# Altium PCB InputCard.PcbDoc
Units mm, origin at the board's own origin, x right, y up, seen from the top; angles counter-clockwise.
Board outline 160 x 100 mm, 2 copper layers (Top Layer, Bottom Layer); 103 components, 109 nets, 551 pads, 68 vias.
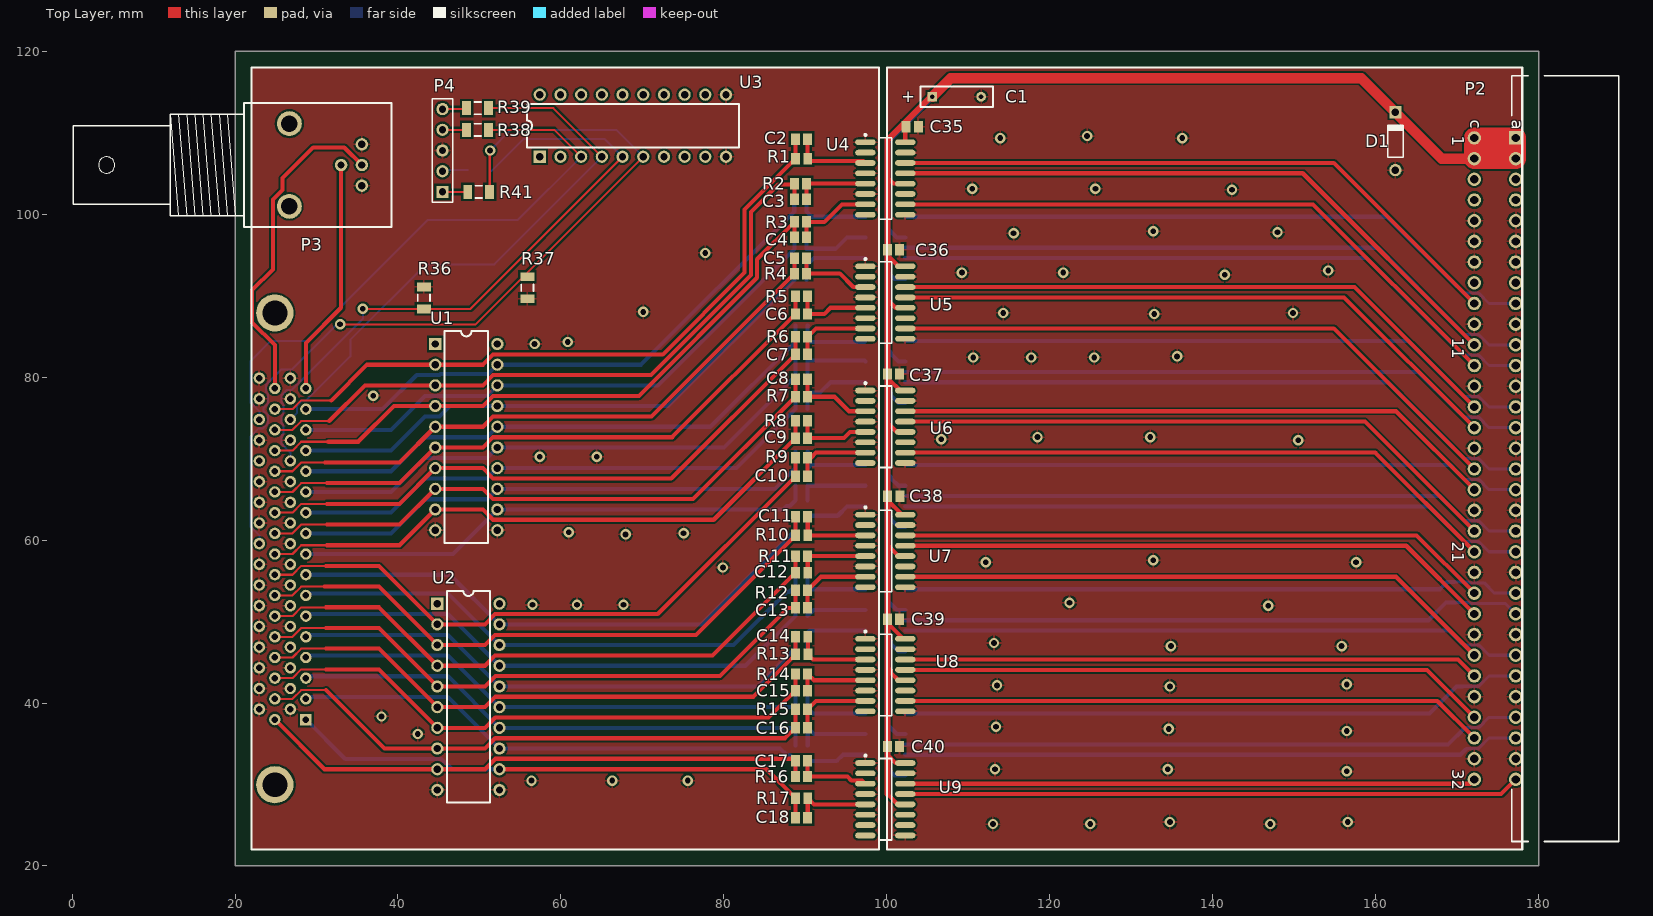
[diagram p0: Top Layer view]
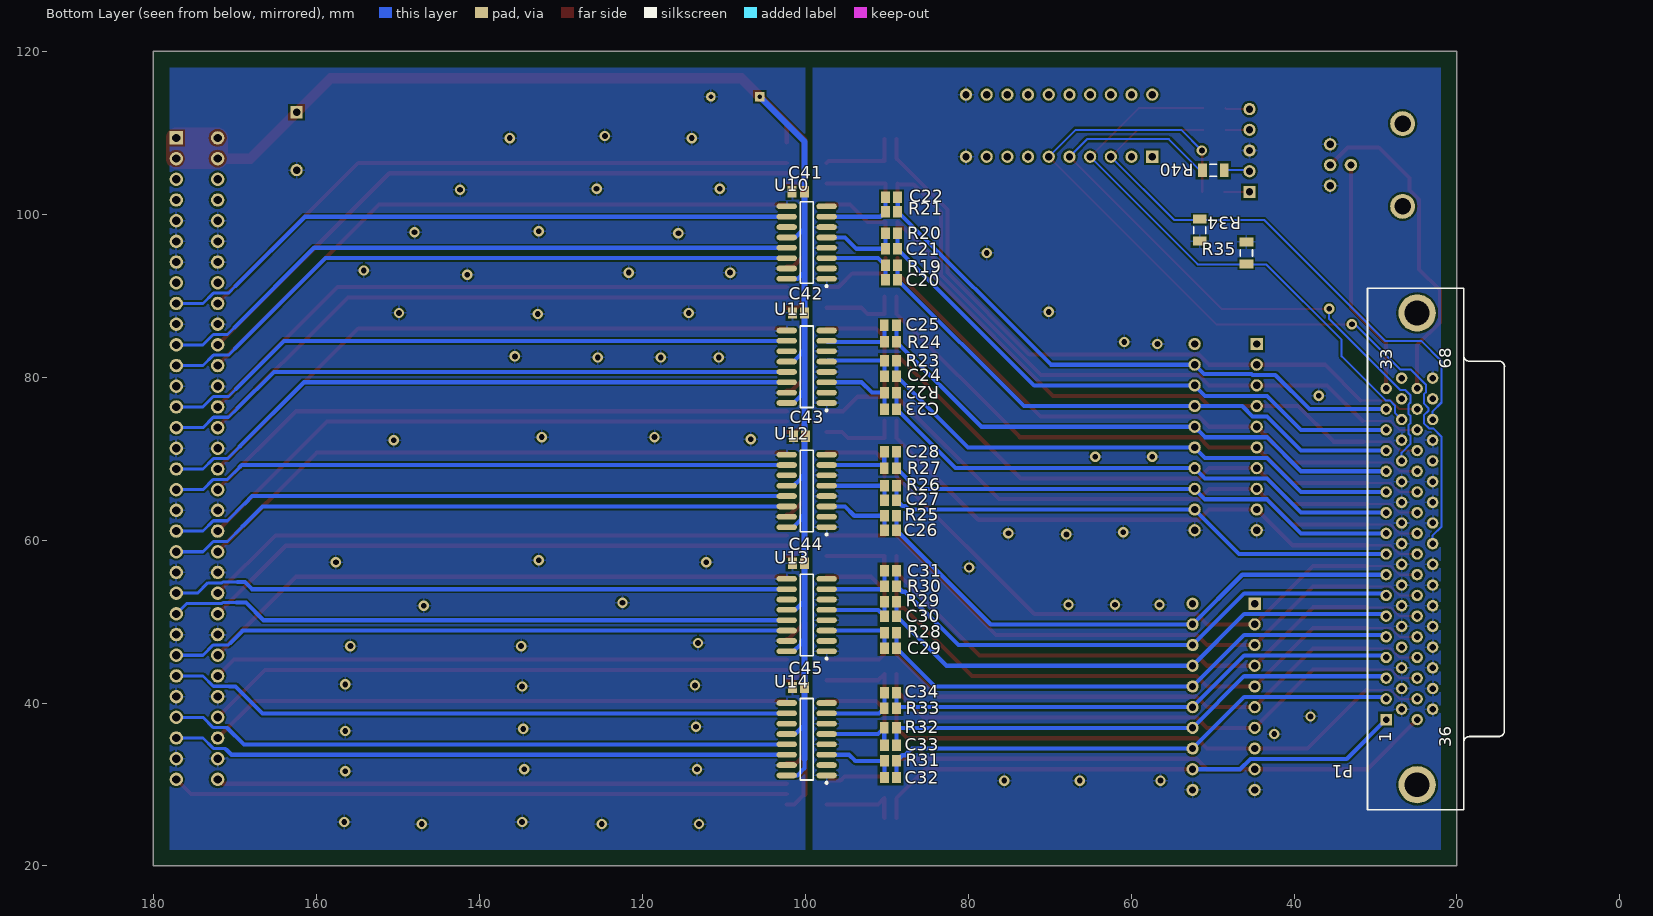
[diagram p1: Bottom Layer view, seen from below]

## Layer stack, top to bottom
Top Solder: solder mask 0.0102, Solder Resist, Dk 3.5
Top Layer: signal copper 0.0356
Dielectric 1: dielectric 0.32, FR-4, Dk 4.8
Bottom Layer: signal copper 0.0356
Bottom Solder: solder mask 0.0102, Solder Resist, Dk 3.5

## Board outline
20,20 180,20 180,120 20,120

## Design rules (kind name [scope] priority, off if disabled: settings)
Clearance [All] p1: gap=0.254 ignorepadtopadclearanceinfootprint=FALSE except(0: Arc-Hole Track-Hole SMDPad-Hole THPad-Hole Via-Hole Fill-Hole Poly-Hole Region-Hole Text-Hole)
PolygonConnect [All] p1: connectstyle=Relief reliefconductorwidth=0.254 reliefentries=4 polygonreliefangle="90 Angle" airgapwidth=0.254
RoutingVias [All] p1: holewidth=0.711 width=1.27 viastyle="Through Hole" minholewidth=0.711 minwidth=1.27 maxholewidth=0.711 maxwidth=1.27
SolderMaskExpansion [All] p1: expansion=0.102
Width [All] p1: maxlimit=2.54 minlimit=0.254 preferedwidth=0.508
30 further rules are at their usual default settings.

## Components (designator, comment, footprint, x,y, rotation, side; value= is the part's Value field where it differs from the comment)
C1 "Cap Pol1" Captantalum 108.585,114.427 r180 top value=10uF
C2 "Cap Semi" 0805 89.535,109.22 r0 top value=100pF
C3 "Cap Semi" 0805 89.408,101.854 r0 top value=100pF
C4 "Cap Semi" 0805 89.408,97.155 r0 top value=100pF
C5 "Cap Semi" 0805 89.408,94.615 r0 top value=100pF
C6 "Cap Semi" 0805 89.535,87.757 r0 top value=100pF
C7 "Cap Semi" 0805 89.523,82.804 r0 top value=100pF
C8 "Cap Semi" 0805 89.523,79.756 r0 top value=100pF
C9 "Cap Semi" 0805 89.535,72.517 r0 top value=100pF
C10 "Cap Semi" 0805 89.535,67.818 r0 top value=100pF
C11 "Cap Semi" 0805 89.535,62.865 r0 top value=100pF
C12 "Cap Semi" 0805 89.547,56.007 r0 top value=100pF
C13 "Cap Semi" 0805 89.523,51.689 r0 top value=100pF
C14 "Cap Semi" 0805 89.547,48.133 r0 top value=100pF
C15 "Cap Semi" 0805 89.535,41.529 r0 top value=100pF
C16 "Cap Semi" 0805 89.523,36.957 r0 top value=100pF
C17 "Cap Semi" 0805 89.523,32.893 r0 top value=100pF
C18 "Cap Semi" 0805 89.535,25.908 r0 top value=100pF
C20 "Cap Semi" 0805 89.408,91.948 r0 bottom value=100pF
C21 "Cap Semi" 0805 89.408,95.758 r0 bottom value=100pF
C22 "Cap Semi" 0805 89.396,102.108 r0 bottom value=100pF
C23 "Cap Semi" 0805 89.535,76.073 r0 bottom value=100pF
C24 "Cap Semi" 0805 89.535,80.137 r0 bottom value=100pF
C25 "Cap Semi" 0805 89.547,86.36 r0 bottom value=100pF
C26 "Cap Semi" 0805 89.535,61.214 r0 bottom value=100pF
C27 "Cap Semi" 0805 89.535,64.897 r0 bottom value=100pF
C28 "Cap Semi" 0805 89.535,70.866 r0 bottom value=100pF
C29 "Cap Semi" 0805 89.535,46.736 r0 bottom value=100pF
C30 "Cap Semi" 0805 89.523,50.673 r0 bottom value=100pF
C31 "Cap Semi" 0805 89.535,56.261 r0 bottom value=100pF
C32 "Cap Semi" 0805 89.535,30.861 r0 bottom value=100pF
C33 "Cap Semi" 0805 89.535,34.798 r0 bottom value=100pF
C34 "Cap Semi" 0805 89.535,41.275 r0 bottom value=100pF
C35 "Cap Semi" 0805 103.124,110.744 r0 top value=47nF
C36 "Cap Semi" 0805 100.838,95.631 r0 top value=47nF
C37 "Cap Semi" 0805 100.838,80.391 r0 top value=47nF
C38 "Cap Semi" 0805 100.85,65.405 r0 top value=47nF
C39 "Cap Semi" 0805 100.838,50.292 r0 top value=47nF
C40 "Cap Semi" 0805 100.838,34.671 r0 top value=47nF
C41 "Cap Semi" 0805 100.85,102.743 r0 bottom value=47nF
C42 "Cap Semi" 0805 100.838,87.884 r0 bottom value=47nF
C43 "Cap Semi" 0805 100.711,72.771 r0 bottom value=47nF
C44 "Cap Semi" 0805 100.838,57.15 r0 bottom value=47nF
C45 "Cap Semi" 0805 100.838,41.91 r0 bottom value=47nF
D1 "Zener Diode BZX79C5V6" DO-35 162.433,108.966 r90 top
P1 "TE 2-5174225-5" "Connector 68 plug" 19.177,58.928 r90 bottom
P2 "HARTING 09032646824" EURO2.54-2H64-NH 182.5,70 r270 top
P3 "Winchester Interconnect 364A2595" "Double BNC 2" 33.02,106.045 r180 top
P4 "Header 5" HDR1X5 45.466,102.743 r90 top
R1 "Res" 0805 89.547,106.807 r0 top value=510R
R2 "Res" 0805 89.408,103.759 r0 top value=510R
R3 "Res" 0805 89.408,99.06 r0 top value=510R
R4 "Res" 0805 89.396,92.71 r0 top value=510R
R5 "Res" 0805 89.535,89.916 r0 top value=510R
R6 "Res" 0805 89.535,84.963 r0 top value=510R
R7 "Res" 0805 89.523,77.597 r0 top value=510R
R8 "Res" 0805 89.535,74.676 r0 top value=510R
R9 "Res" 0805 89.535,70.104 r0 top value=510R
R10 "Res" 0805 89.547,60.579 r0 top value=510R
R11 "" 0805 89.535,58.039 r0 top value=510R
R12 "Res" 0805 89.535,53.848 r0 top value=510R
R13 "Res" 0805 89.559,45.974 r0 top value=510R
R14 "Res" 0805 89.535,43.561 r0 top value=510R
R15 "Res" 0805 89.535,39.243 r0 top value=510R
R16 "Res" 0805 89.535,30.988 r0 top value=510R
R17 "Res" 0805 89.547,28.321 r0 top value=510R
R19 "Res" 0805 89.408,93.726 r0 bottom value=510R
R20 "Res" 0805 89.408,97.663 r0 bottom value=510R
R21 "Res" 0805 89.396,100.33 r0 bottom value=510R
R22 "Res" 0805 89.523,78.105 r0 bottom value=510R
R23 "Res" 0805 89.535,82.042 r0 bottom value=510R
R24 "Res" 0805 89.535,84.328 r0 bottom value=510R
R25 "Res" 0805 89.535,62.992 r0 bottom value=510R
R26 "Res" 0805 89.535,66.675 r0 bottom value=510R
R27 "Res" 0805 89.547,68.834 r0 bottom value=510R
R28 "Res" 0805 89.535,48.641 r0 bottom value=510R
R29 "Res" 0805 89.535,52.451 r0 bottom value=510R
R30 "Res" 0805 89.535,54.356 r0 bottom value=510R
R31 "Res" 0805 89.535,32.893 r0 bottom value=510R
R32 "Res" 0805 89.547,36.957 r0 bottom value=510R
R33 "Res" 0805 89.547,39.37 r0 bottom value=510R
R34 "" 1206 51.562,98.044 r270 bottom value=1k
R35 "" 1206 45.847,95.25 r90 bottom value=1k
R36 "" 1206 43.18,89.742 r90 top value=1k
R37 "" 1206 55.88,90.979 r270 top value=1k
R38 "" 1206 49.784,110.363 r180 top value=0R
R39 "" 1206 49.784,113.03 r180 top value=0R
R40 "" 1206 49.911,105.41 r180 bottom value=0R
R41 "" 1206 49.911,102.743 r180 top value=0R
U1 "SN74S1053" DIP-20 48.387,72.644 r0 top
U2 "SN74S1053" DIP-20 48.641,40.767 r0 top
U3 "SN74S1053" DIP-20 68.834,110.871 r90 top
U4 "IL613-3E" R-16_M 99.822,104.394 r0 top
U5 "IL613-3E" R-16_M 99.822,89.154 r0 top
U6 "IL613-3E" R-16_M 99.822,73.914 r0 top
U7 "IL613-3E" R-16_M 99.822,58.674 r0 top
U8 "IL613-3E" R-16_M 99.822,43.434 r0 top
U9 "IL613-3E" R-16_M 99.822,28.194 r0 top
U10 "IL613-3E" R-16_M 99.822,96.52 r0 bottom
U11 "IL613-3E" R-16_M 99.822,81.28 r0 bottom
U12 "IL613-3E" R-16_M 99.822,66.04 r0 bottom
U13 "IL613-3E" R-16_M 99.822,50.8 r0 bottom
U14 "IL613-3E" R-16_M 99.822,35.56 r0 bottom

## Footprints (in the part's own frame and the unit in brackets; to place one, negate y for a bottom-side part, rotate by r counter-clockwise, add the part's x,y. Pads: shape width x height; smd on the part's side, far side on the other; paste and mask are expansions set on the pad)
0805 [mm] "Chip Capacitor, Body 2.0x1.3mm, IPC High Density"
  rect 1.1x1.4 smd: 1(-0.75,0) 2(0.75,0)
  body extent -1.1,-0.72 1.1,0.72, height 1.4
1206 [mm] "Chip Capacitor, Body 3.2x1.6mm, IPC High Density"
  rect 1.1x1.7 smd: 1(-1.35,0) 2(1.35,0)
  silkscreen extent -0.4,-0.75 0.4,0.75, body extent -1.7,-0.9 1.7,0.9, height 1.3
Captantalum [mm] "Polarized Capacitor (Radial); 2 Leads"
  rect 1.2x1.2 hole 0.6: 1(3,0)
  round 1.2 hole 0.6: 2(-3,0)
  silkscreen extent -4.44,-1.27 4.44,1.27
"Connector 68 plug" [mm] "Connector; D Subminiature 050 Series; 68 Position; Right Angle"
  rect 1.4x1.4 hole 0.8: 1(-20.955,9.515)
  round 1.4 hole 0.8: 2(-19.685,7.61) 3(-18.415,9.515) 4(-17.145,7.61) 5(-15.875,9.515) 6(-14.605,7.61) 7(-13.335,9.515) 8(-12.065,7.61) 9(-10.795,9.515) 10(-9.525,7.61) 11(-8.255,9.515) 12(-6.985,7.61) 13(-5.715,9.515) 14(-4.445,7.61) 15(-3.175,9.515) 16(-1.905,7.61) 17(-0.635,9.515) 18(0.635,7.61) 19(1.905,9.515) 20(3.175,7.61) 21(4.445,9.515) 22(5.715,7.61) 23(6.985,9.515) 24(8.255,7.61) 25(9.525,9.515) 26(10.795,7.61) 27(12.065,9.515) 28(13.335,7.61) 29(14.605,9.515) 30(15.875,7.61) 31(17.145,9.515) 32(18.415,7.61) 33(19.685,9.515) 34(20.955,7.61) 35(-20.955,5.705) 36(-19.685,3.8) 37(-18.415,5.705) 38(-17.145,3.8) 39(-15.875,5.705) 40(-14.605,3.8) 41(-13.335,5.705) 42(-12.065,3.8) 43(-10.795,5.705) 44(-9.525,3.8) 45(-8.255,5.705) 46(-6.985,3.8) 47(-5.715,5.705) 48(-4.445,3.8) 49(-3.175,5.705) 50(-1.905,3.8) 51(-0.635,5.705) 52(0.635,3.8) 53(1.905,5.705) 54(3.175,3.8) 55(4.445,5.705) 56(5.715,3.8) 57(6.985,5.705) 58(8.255,3.8) 59(9.525,5.705) 60(10.795,3.8) 61(12.065,5.705) 62(13.335,3.8) 63(14.605,5.705) 64(15.875,3.8) 65(17.145,5.705) 66(18.415,3.8) 67(19.685,5.705) 68(20.955,3.8)
  round 4.572 hole 3.048: M(-28.955,5.71) M(28.955,5.71)
  silkscreen extent -32,-5.03 32,11.81
DIP-20 [mm]
  rect 1.5x1.5 hole 0.9: 1(-3.81,11.43)
  round 1.5 hole 0.9: 2(-3.81,8.89) 3(-3.81,6.35) 4(-3.81,3.81) 5(-3.81,1.27) 6(-3.81,-1.27) 7(-3.81,-3.81) 8(-3.81,-6.35) 9(-3.81,-8.89) 10(-3.81,-11.43) 11(3.81,-11.43) 12(3.81,-8.89) 13(3.81,-6.35) 14(3.81,-3.81) 15(3.81,-1.27) 16(3.81,1.27) 17(3.81,3.81) 18(3.81,6.35) 19(3.81,8.89) 20(3.81,11.43)
  silkscreen extent -2.65,-13 2.65,13
DO-35 [mm] "Diode, Axial; Body 3.8 x 1.9 mm (LxDia. max), Lead Dia. 0.53 mm (max)"
  round 1.5 hole 0.9: 1(-3.55,0)
  rect 1.5x1.5 hole 0.9: 2(3.55,0)
  silkscreen extent -1.95,-0.95 2.05,0.95
"Double BNC 2" [mil]
  round 60 hole 35: 1(-100,100) 2(-100,0) 3(-100,-100) 4(0,0)
  round 120 hole 79: ""(250,200) ""(250,-200)
  silkscreen extent -244,-300 1294,300
EURO2.54-2H64-NH [mm] "Connector; DIN 41612, Type C, Thru-Hole; Rows a+c, 64 Position; Right Angle"
  rect 1.65x1.65 hole 1: A1(-39.37,-5.3)
  round 1.65 hole 1: A2(-36.83,-5.3) A3(-34.29,-5.3) A4(-31.75,-5.3) A5(-29.21,-5.3) A6(-26.67,-5.3) A7(-24.13,-5.3) A8(-21.59,-5.3) A9(-19.05,-5.3) A10(-16.51,-5.3) A11(-13.97,-5.3) A12(-11.43,-5.3) A13(-8.89,-5.3) A14(-6.35,-5.3) A15(-3.81,-5.3) A16(-1.27,-5.3) A17(1.27,-5.3) A18(3.81,-5.3) A19(6.35,-5.3) A20(8.89,-5.3) A21(11.43,-5.3) A22(13.97,-5.3) A23(16.51,-5.3) A24(19.05,-5.3) A25(21.59,-5.3) A26(24.13,-5.3) A27(26.67,-5.3) A28(29.21,-5.3) A29(31.75,-5.3) A30(34.29,-5.3) A31(36.83,-5.3) A32(39.37,-5.3) C1(-39.37,-10.38) C2(-36.83,-10.38) C3(-34.29,-10.38) C4(-31.75,-10.38) C5(-29.21,-10.38) C6(-26.67,-10.38) C7(-24.13,-10.38) C8(-21.59,-10.38) C9(-19.05,-10.38) C10(-16.51,-10.38) C11(-13.97,-10.38) C12(-11.43,-10.38) C13(-8.89,-10.38) C14(-6.35,-10.38) C15(-3.81,-10.38) C16(-1.27,-10.38) C17(1.27,-10.38) C18(3.81,-10.38) C19(6.35,-10.38) C20(8.89,-10.38) C21(11.43,-10.38) C22(13.97,-10.38) C23(16.51,-10.38) C24(19.05,-10.38) C25(21.59,-10.38) C26(24.13,-10.38) C27(26.67,-10.38) C28(29.21,-10.38) C29(31.75,-10.38) C30(34.29,-10.38) C31(36.83,-10.38) C32(39.37,-10.38)
  silkscreen extent -47,-5.8 47,7.34, body extent -47,-5.8 47,7.34, height 11.1
HDR1X5 [mm] "Connector; Header; 5 Position"
  rect 1.5x1.5 hole 0.9: 1(0,0)
  round 1.5 hole 0.9: 2(2.54,0) 3(5.08,0) 4(7.62,0) 5(10.16,0)
  silkscreen extent -1.27,-1.27 11.43,1.27
R-16_M [mm] "SOIC, 16-Leads, Body 9.9x3.9mm, Pitch 1.27mm, IPC Low Density"
  oval 2.5x0.7 smd: 1(-2.45,4.445) 2(-2.45,3.175) 3(-2.45,1.905) 4(-2.45,0.635) 5(-2.45,-0.635) 6(-2.45,-1.905) 7(-2.45,-3.175) 8(-2.45,-4.445) 9(2.45,-4.445) 10(2.45,-3.175) 11(2.45,-1.905) 12(2.45,-0.635) 13(2.45,0.635) 14(2.45,1.905) 15(2.45,3.175) 16(2.45,4.445)
  silkscreen extent -2.57,-5 0.8,5.47, body extent -2,-5 2,5, height 1.75

## Part data
C1: "Polarized Capacitor (Radial)", LatestRevisionDate=17-Jul-2002, LatestRevisionNote="Re-released for DXP Platform.", PackageDescription="Polarized Capacitor (Radial); 2 Leads", PackageReference=RB7.6-15, Published=8-Jun-2000, Publisher="Altium Limited"
C2 C3 C4 C5 C6 C7 C8 C9 C10 C11 C12 C13 C14 C15 C16 C17 C18 C20 C21 C22 C23 C24 C25 C26 C27 C28 C29 C30 C31 C32 C33 C34 C35 C36 C37 C38 C39 C40 C41 C42 C43 C44 C45: "Capacitor (Semiconductor SIM Model)", LatestRevisionDate=29-May-2009, LatestRevisionNote="IPC-7351 Footprint Added.", PackageDescription="Chip Capacitor", PackageReference=C1206, Published=8-Jun-2000, Publisher="Altium Limited"
D1: library part "Diode 1N914", "High Conductance Fast Diode", Code_JEDEC=DO-204-AH, ComponentLink1Description="Manufacturer Link", ComponentLink1URL=http://www.fairchildsemi.com/, ComponentLink2Description=Datasheet, ComponentLink2URL=http://www.fairchildsemi.com/ds/1N%2F1N4448.pdf, DatasheetVersion=1997, LatestRevisionDate=17-Jul-2002, LatestRevisionNote="Re-released for DXP Platform.", PackageDescription="Diode, Axial; Body 3.8 x 1.9 mm (LxDia. max), Lead Dia. 0.53 mm (max)", PackageReference=DO-35, Published=8-Jun-2000, Publisher="Altium Limited"
P1: library part "Connector 68", "Receptacle Header Assemby", PackageDocument=B, DatasheetDocument=1-Oct-1983, LatestRevisionDate=17-Jul-2002, LatestRevisionNote="Re-released for DXP Platform.", Orientation="Right Angle", PackageReference=178240-8, Positions=68, Published=15-Jun-2001, Publisher="Altium Limited"
P2: library part "Din 41612 64NH", "Din 41612"
P3: library part "Double BNC New", "Double BNC Elbow Connector", LatestRevisionDate=17-Jul-2002, LatestRevisionNote="Re-released for DXP Platform.", Publisher="Altium Limited"
P4: "Header, 5-Pin", LatestRevisionDate=17-Jul-2002, LatestRevisionNote="Re-released for DXP Platform.", Publisher="Altium Limited"
R1 R2 R3 R4 R5 R6 R7 R8 R9 R10 R12 R13 R14 R15 R16 R17 R19 R20 R21 R22 R23 R24 R25 R26 R27 R28 R29 R30 R31 R32 R33: library part Res_SM, "Resistor", LatestRevisionDate=29-May-2009, LatestRevisionNote="IPC-7351 Footprint Added.", PackageDescription="Chip Resistor", PackageReference=J1-0603, Published=8-Jun-2000, Publisher="Altium Limited"
R11 R34 R35 R36 R37 R38 R39 R40 R41: library part Res3, "Resistor", LatestRevisionDate=29-May-2009, LatestRevisionNote="IPC-7351 Footprint Added.", PackageDescription="Chip Resistor", PackageReference=J1-0603, Published=8-Jun-2000, Publisher="Altium Limited"

## Via types
v1: diameter 1.27, hole 0.711, Top Layer to Bottom Layer, 68 vias

## Nets (pads, with @x,y where several pads share a name; then routed paths per layer and width w, separated by ;. In a path a pad name is that pad's centre, name@x,y a point inside that pad or via, vN(x,y) a via of type N, cw(c..) or ccw(c..) an arc to the next point about the centre after c; other vN are vias at no path point)
+5V: C1.1 C35.1 C36.1 C37.1 C38.1 C39.1 C40.1 C41.1 C42.1 C43.1 C44.1 C45.1 D1.2 P2.A1 P2.A2 P2.C1 P2.C2 U4.12 U4.16 U5.12 U5.16 U6.12 U6.16 U7.12 U7.16 U8.12 U8.16 U9.12 U9.16 U10.12 U10.16 U11.12 U11.16 U12.12 U12.16 U13.12 U13.16 U14.12 U14.16 | length 319.9
  Top Layer w0.508: 100.076,28.829 101.346,27.559 U9.12 ; 100.076,33.655 101.092,32.639 U9.16 ; 100.076,44.45 100.514,44.012 100.514,43.714 101.429,42.799 U8.12 ; C39.1@100.076,50.292 100.076,49.836 102.033,47.879 U8.16 ; 100.076,59.436 100.514,58.998 100.514,58.954 101.429,58.039 U7.12 ; C38.1@100.076,64.897 101.854,63.119 U7.16 ; 100.076,74.422 101.219,73.279 U6.12 ; 100.076,89.535 101.092,88.519 U5.12 ; C36.1@100.076,94.996 101.473,93.599 U5.16 ; 100.076,104.521 100.838,103.759 U4.12 ; C37.1@100.292,79.718 101.652,78.359 U6.16 ; U4.16 102.272,110.642 C35.1
  Top Layer w0.762: 100.076,28.829 100.076,33.655 100.076,44.45 C39.1@100.076,49.836 ; C39.1@100.076,50.292 100.076,59.436 100.076,64.897 100.076,74.422 100.076,89.535 100.076,94.996 100.076,104.521 100.076,109.106 105.397,114.427 C1.1
  Top Layer w1.27: C1.1 107.871,116.713 158.236,116.713 D1.2 168.119,106.83 P2.C2
  Top Layer w2.54: P2.C2 P2.A2 P2.A1 P2.C1 P2.C2
  Bottom Layer w0.508: 100.076,33.147 100.076,32.004 100.965,31.115 U14.16 ; 100.076,37.338 101.219,36.195 U14.12 ; 100.076,48.006 100.514,47.568 100.514,47.27 101.429,46.355 U13.16 ; 100.076,52.578 101.219,51.435 U13.12 ; 100.076,63.246 100.514,62.808 100.514,62.51 101.429,61.595 U12.16 ; 100.076,68.199 100.514,67.761 100.514,67.59 101.429,66.675 U12.12 ; 100.076,78.486 100.514,78.048 100.514,77.75 101.429,76.835 U11.16 ; 100.076,83.439 100.514,83.001 100.514,82.83 101.429,81.915 U11.12 ; 100.076,92.964 100.965,92.075 U10.16 ; 100.076,98.298 101.219,97.155 U10.12
  Bottom Layer w0.762: 100.076,33.147 100.076,37.338 100.076,48.006 100.076,52.578 100.076,63.246 100.076,68.199 100.076,78.486 100.076,83.439 100.076,92.964 100.076,98.298 100.076,108.918 C1.1
A0: P2.C9 U4.14 | length 77
  Top Layer w0.508: U4.14 154.871,106.299 P2.C9
A1: P2.A9 U10.10 | length 79.3
  Bottom Layer w0.381: 169.926,91.186 170.793,90.319 172.646,90.319 173.915,89.05 P2.A9
  Bottom Layer w0.508: U10.10 161.417,99.695 169.926,91.186
A2: P2.C11 U4.13 | length 78.6
  Top Layer w0.508: U4.13 151.061,105.029 P2.C11
A3: P2.A11 U10.13 | length 79.9
  Bottom Layer w0.381: 170.053,86.106 170.92,85.239 172.646,85.239 173.915,83.97 P2.A11
  Bottom Layer w0.508: U10.13 160.274,95.885 170.053,86.106
A4: P2.C12 U4.10 | length 78
  Top Layer w0.508: U4.10 152.331,101.219 P2.C12
A5: P2.A12 U10.14 | length 80.4
  Bottom Layer w0.381: 169.99,83.502 170.793,82.699 172.646,82.699 173.915,81.43 P2.A12
  Bottom Layer w0.508: U10.14 158.877,94.615 169.99,83.502
A6: P2.C14 U5.14 | length 75.9
  Top Layer w0.508: U5.14 157.411,91.059 P2.C14
A7: P2.A14 U11.10 | length 78.3
  Bottom Layer w0.381: 169.862,78.55 170.793,77.619 172.646,77.619 173.915,76.35 P2.A14
  Bottom Layer w0.508: U11.10 163.957,84.455 169.862,78.55
B0: P2.C15 U5.13 | length 76.5
  Top Layer w0.508: U5.13 156.141,89.789 P2.C15
B1: P2.A15 U11.13 | length 77.8
  Bottom Layer w0.381: 169.672,76.2 170.793,75.079 172.646,75.079 173.915,73.81 P2.A15
  Bottom Layer w0.508: U11.13 165.227,80.645 169.672,76.2
B2: P2.C17 U5.10 | length 77
  Top Layer w0.508: U5.10 154.871,85.979 P2.C17
B3: P2.A17 U11.14 | length 79.3
  Bottom Layer w0.381: 169.418,71.501 170.92,69.999 172.646,69.999 173.915,68.73 P2.A17
  Bottom Layer w0.508: U11.14 161.544,79.375 169.418,71.501
B4: P2.C18 U6.14 | length 73.8
  Top Layer w0.508: U6.14 162.491,75.819 P2.C18
B5: P2.A18 U12.10 | length 76.2
  Bottom Layer w0.381: 169.418,68.961 170.92,67.459 172.646,67.459 173.915,66.19 P2.A18
  Bottom Layer w0.508: U12.10 169.164,69.215 169.418,68.961
B6: P2.C20 U6.13 | length 75.4
  Top Layer w0.508: U6.13 158.681,74.549 P2.C20
B7: P2.A20 U12.13 | length 76.7
  Bottom Layer w0.381: 168.783,64.516 170.92,62.379 172.646,62.379 173.915,61.11 P2.A20
  Bottom Layer w0.508: U12.13 167.894,65.405 168.783,64.516
C0: P2.C21 U6.10 | length 74.9
  Top Layer w0.508: U6.10 159.951,70.739 P2.C21
C1: P2.A21 U12.14 | length 77.2
  Bottom Layer w0.381: 169.037,61.722 170.92,59.839 172.646,59.839 173.915,58.57 P2.A21
  Bottom Layer w0.508: U12.14 166.624,64.135 169.037,61.722
C2: P2.C23 U7.14 | length 72.8
  Top Layer w0.508: U7.14 165.031,60.579 P2.C23
C3: P2.A23 U13.10 | length 75.9
  Bottom Layer w0.381: 169.672,54.864 171.491,54.864 171.594,54.761 173.331,54.761 174.602,53.49 P2.A23
  Bottom Layer w0.508: U13.10 167.894,53.975 168.783,54.864 169.672,54.864
C4: P2.C24 U7.13 | length 73.3
  Top Layer w0.508: U7.13 163.761,59.309 P2.C24
C5: P2.A24 U13.13 | length 76.4
  Bottom Layer w0.381: 169.799,52.324 171.491,52.324 171.594,52.221 175.93,52.221 P2.A24
  Bottom Layer w0.508: U13.13 166.497,50.165 168.656,52.324 169.799,52.324
C6: P2.C26 U7.10 | length 73.8
  Top Layer w0.508: U7.10 162.491,55.499 P2.C26
C7: P2.A26 U13.14 | length 76.2
  Bottom Layer w0.381: 170.561,47.371 170.793,47.139 172.646,47.139 173.915,45.87 P2.A26
  Bottom Layer w0.508: U13.14 169.037,48.895 170.561,47.371
D0: P2.C27 U8.14 | length 70.7
  Top Layer w0.508: U8.14 170.111,45.339 P2.C27
D1: P2.A27 U14.10 | length 76.8
  Bottom Layer w0.381: 170.688,42.037 170.712,42.061 172.646,42.061 173.915,43.33 P2.A27
  Bottom Layer w0.508: U14.10 166.624,38.735 169.926,42.037 170.688,42.037
D2: P2.C29 U8.13 | length 72.3
  Top Layer w0.508: U8.13 166.301,44.069 P2.C29
D3: P2.A29 U14.13 | length 76.3
  Bottom Layer w0.381: 170.942,36.957 170.966,36.981 172.646,36.981 173.915,38.25 P2.A29
  Bottom Layer w0.508: U14.13 168.91,34.925 170.942,36.957
D4: P2.C30 U8.10 | length 71.7
  Top Layer w0.508: U8.10 167.571,40.259 P2.C30
D5: P2.A30 U14.14 | length 75.8
  Bottom Layer w0.381: 171.069,34.29 171.22,34.441 172.646,34.441 173.915,35.71 P2.A30
  Bottom Layer w0.508: U14.14 170.434,33.655 171.069,34.29
D6: P2.C32 U9.14 | length 70.1
  Top Layer w0.508: U9.14 171.589,30.099 P2.C32
D7: P2.A32 U9.13 | length 75.7
  Top Layer w0.508: U9.13 175.399,28.829 P2.A32
GND: C1.2 C35.2 C36.2 C37.2 C38.2 C39.2 C40.2 C41.2 C42.2 C43.2 C44.2 C45.2 D1.1 P2.A5 P2.A6 P2.A7 P2.A10 P2.A13 P2.A16 P2.A19 P2.A22 P2.A25 P2.A28 P2.A31 P2.C5 P2.C6 P2.C7 P2.C10 P2.C13 P2.C16 P2.C19 P2.C22 P2.C25 P2.C28 P2.C31 U4.9 U4.15 U5.9 U5.15 U6.9 U6.15 U7.9 U7.15 U8.9 U8.15 U9.9 U9.15 U10.9 U10.15 U11.9 U11.15 U12.9 U12.15 U13.9 U13.15 U14.9 U14.15
  other v1: 113.03,25.146 124.968,25.146 147.066,25.146 134.747,25.4 156.591,25.4 156.464,31.623 113.284,31.877 134.493,31.877 156.464,36.576 134.62,36.83 113.411,37.084 134.747,42.037 113.538,42.164 156.464,42.291 134.874,46.99 155.829,46.99 113.157,47.371 146.812,51.943 122.428,52.324 112.141,57.277 157.607,57.277 132.715,57.531 150.495,72.263 106.68,72.39 118.491,72.644 132.334,72.644 110.617,82.423 117.729,82.423 125.476,82.423 135.636,82.55 132.842,87.757 114.3,87.884 149.86,87.884 141.478,92.583 109.22,92.837 121.666,92.837 154.178,93.091 115.57,97.663 147.955,97.79 132.715,97.917 142.367,102.997 110.49,103.124 125.603,103.124 113.919,109.347 136.271,109.347 124.587,109.601
NA0: C2.1 P1.65 R1.1 U1.2 | length 83.6
  Top Layer w0.254: P1.65 27.046,76.073 28.127,77.154 31.815,77.154
  Top Layer w0.508: 31.815,77.154 36.195,81.534 U1.2 50.418,81.534 51.676,82.792 72.505,82.792 82.55,92.837 82.55,100.584 R1.1@88.785,106.819 ; C2.1 R1.1@88.785,106.819 ; R1.1 R1.1@88.785,106.819
NA1: C22.1 P1.31 R21.1 U1.19 | length 71.8
  Bottom Layer w0.508: P1.31 38.1,76.073 42.303,80.276 45.098,80.276 45.213,80.391 51.054,80.391 U1.19 69.85,81.534 R21.1 C22.1
NA2: C3.1 P1.63 R2.1 U1.3 | length 82.4
  Top Layer w0.254: P1.63 27.046,73.533 28.127,74.614 31.561,74.614
  Top Layer w0.508: 31.561,74.614 35.941,78.994 U1.3 50.418,78.994 51.676,80.252 71.043,80.252 83.312,92.521 83.312,100.268 86.676,103.632 R2.1@88.392,103.632 ; C3.1 R2.1
NA3: C21.1 P1.29 R20.1 U1.18 | length 71.1
  Bottom Layer w0.508: P1.29 39.14,73.533 43.319,77.712 50.915,77.712 U1.18 71.894,78.994 C21.1 R20.1
NA4: C4.1 P1.61 R3.1 U1.4 | length 78.6
  Top Layer w0.254: P1.61 27.046,70.993 28.127,72.074 31.434,72.074
  Top Layer w0.508: 31.434,72.074 35.117,72.074 39.497,76.454 U1.4 50.418,76.454 51.676,77.712 69.58,77.712 84.074,92.206 84.074,94.476 R3.1 C4.1
NA5: C20.1 P1.27 R19.1 U1.17 | length 70.4
  Bottom Layer w0.508: P1.27 39.14,70.993 43.319,75.172 45.074,75.172 46.356,76.454 U1.17 73.164,76.454 C20.1 R19.1
NA6: C5.1 P1.59 R4.1 U1.5 | length 75.7
  Top Layer w0.254: P1.59 27.046,68.453 28.127,69.534 31.053,69.534
  Top Layer w0.508: 31.053,69.534 40.197,69.534 U1.5 50.418,73.914 51.676,75.172 71.108,75.172 R4.1 88.658,92.722 C5.1
NA7: C25.1 P1.25 R24.1 U1.16 | length 68.7
  Bottom Layer w0.508: P1.25 39.14,68.453 43.319,72.632 50.915,72.632 U1.16 78.371,73.914 R24.1 88.797,84.34 C25.1
NB0: C6.1 P1.57 R5.1 U1.6 | length 75.1
  Top Layer w0.254: P1.57 27.046,65.913 28.127,66.994 31.307,66.994
  Top Layer w0.508: 31.307,66.994 40.197,66.994 U1.6 50.418,71.374 51.676,72.632 73.66,72.632 C6.1 R5.1
NB1: C24.1 P1.23 R23.1 U1.15 | length 67.9
  Bottom Layer w0.508: P1.23 39.14,65.913 43.319,70.092 50.915,70.092 U1.15 80.022,71.374 C24.1 R23.1
NB2: C7.1 P1.55 R6.1 U1.7 | length 75.1
  Top Layer w0.254: P1.55 27.046,63.373 28.127,64.454 31.307,64.454
  Top Layer w0.508: 31.307,64.454 40.197,64.454 U1.7 50.418,68.834 51.676,67.576 73.545,67.576 C7.1 88.785,82.816 R6.1
NB3: C23.1 P1.21 R22.1 U1.14 | length 67.4
  Bottom Layer w0.508: P1.21 39.14,63.373 43.319,67.552 50.915,67.552 U1.14 81.546,68.834 C23.1 88.773,76.085 R22.1
NB4: C8.1 P1.53 R7.1 U1.8 | length 74
  Top Layer w0.254: P1.53 27.046,60.833 28.127,61.914 31.304,61.914
  Top Layer w0.508: 31.304,61.914 40.197,61.914 U1.8 50.418,66.294 51.676,65.036 76.212,65.036 R7.1 C8.1
NB5: C28.1 P1.19 R27.1 U1.13 | length 65.5
  Bottom Layer w0.508: P1.19 39.14,60.833 43.319,65.012 50.915,65.012 U1.13 86.257,66.294 R27.1 88.785,68.846 C28.1
NB6: C9.1 P1.51 R8.1 U1.9 | length 73
  Top Layer w0.254: P1.51 27.046,58.293 28.127,59.374 31.307,59.374
  Top Layer w0.508: 31.307,59.374 40.197,59.374 U1.9 50.418,63.754 51.676,62.496 78.764,62.496 C9.1 R8.1
NB7: C27.1 P1.17 R26.1 U1.12 | length 64.6
  Bottom Layer w0.508: P1.17 46.736,58.293 U1.12 87.281,63.754 87.727,64.2 88.088,64.2 C27.1 R26.1
NC0: C10.1 P1.49 R9.1 U2.2 | length 77.1
  Top Layer w0.254: P1.49 27.046,55.753 28.127,56.834 31.18,56.834
  Top Layer w0.508: 31.18,56.834 37.654,56.834 U2.2 50.672,49.657 51.93,50.915 71.882,50.915 C10.1 R9.1
NC1: C26.1 P1.15 R25.1 U2.19 | length 69.2
  Bottom Layer w0.508: P1.15 46.355,55.753 U2.19 77.228,49.657 C26.1 R25.1
NC2: C11.1 P1.47 R10.1 U2.3 | length 75.2
  Top Layer w0.254: P1.47 27.046,53.213 28.127,54.294 30.988,54.294
  Top Layer w0.508: 30.988,54.294 37.654,54.294 U2.3 50.672,47.117 51.93,48.375 76.593,48.375 R10.1 88.785,60.591 C11.1
NC3: C31.1 P1.13 R30.1 U2.18 | length 67.9
  Bottom Layer w0.508: P1.13 28.692,53.455 46.113,53.455 U2.18 81.185,47.117 87.727,53.659 88.088,53.659 R30.1 C31.1
NC4: C12.1 P1.45 R11.1 U2.4 | length 74.1
  Top Layer w0.254: P1.45 27.046,50.673 28.127,51.754 31.177,51.754
  Top Layer w0.508: 31.177,51.754 37.654,51.754 U2.4 50.672,44.577 51.93,45.835 78.625,45.835 C12.1 88.785,56.019 R11.1
NC5: C30.1 P1.11 R29.1 U2.17 | length 67.3
  Bottom Layer w0.508: P1.11 28.692,50.915 46.113,50.915 U2.17 82.677,44.577 C30.1 88.785,50.685 R29.1
NC6: C13.1 P1.43 R12.1 U2.5 | length 73.5
  Top Layer w0.254: P1.43 27.046,48.133 28.127,49.214 31.18,49.214
  Top Layer w0.508: 31.18,49.214 37.654,49.214 U2.5 50.672,42.037 51.954,43.319 79.514,43.319 87.884,51.689 C13.1 88.785,51.701 R12.1
NC7: C29.1 P1.9 R28.1 U2.16 | length 66.8
  Bottom Layer w0.508: P1.9 28.692,48.375 46.113,48.375 U2.16 84.086,42.037 C29.1 R28.1
ND0: C14.1 P1.41 R13.1 U2.6 | length 72.2
  Top Layer w0.254: P1.41 27.046,45.593 28.127,46.674 31.18,46.674
  Top Layer w0.508: 31.18,46.674 37.654,46.674 U2.6 50.672,39.497 51.954,40.779 83.614,40.779 R13.1 88.797,45.986 C14.1
ND1: C34.1 P1.7 R33.1 U2.15 | length 64.9
  Bottom Layer w0.508: P1.7 28.692,45.835 46.113,45.835 U2.15 R33.1@88.67,39.497 ; C34.1 88.785,39.612 R33.1@88.67,39.497 ; R33.1 R33.1@88.67,39.497
ND2: C15.1 P1.39 R14.1 U2.7 | length 71.2
  Top Layer w0.254: P1.39 27.046,43.053 28.127,44.134 31.18,44.134
  Top Layer w0.508: 31.18,44.134 37.654,44.134 U2.7 50.672,36.957 51.942,38.227 85.483,38.227 C15.1 R14.1
ND3: C33.1 P1.5 R32.1 U2.14 | length 65.1
  Bottom Layer w0.508: P1.5 28.692,43.295 46.113,43.295 U2.14 R32.1 88.785,36.945 C33.1
ND4: C16.1 P1.37 R15.1 U2.8 | length 70.7
  Top Layer w0.254: P1.37 27.046,40.513 28.127,41.594 31.18,41.594
  Top Layer w0.508: 31.18,41.594 38.357,34.417 U2.8 50.672,34.417 51.942,35.687 87.503,35.687 C16.1 88.785,36.969 R15.1
ND5: C32.1 P1.3 R31.1 U2.13 | length 65.6
  Bottom Layer w0.508: P1.3 28.692,40.755 46.113,40.755 U2.13 86.9,34.417 87.727,33.59 88.088,33.59 R31.1 C32.1
ND6: C17.1 P1.35 R16.1 U2.9 | length 68.9
  Top Layer w0.508: P1.35 30.978,31.877 U2.9 50.672,31.877 51.954,33.159 88.658,33.159 C17.1@88.773,33.274 ; C17.1 88.785,32.881 R16.1
ND7: C18.1 P1.1 R17.1 U2.12 | length 66.5
  Top Layer w0.508: U2.12 85.241,31.877 R17.1 88.785,28.309 C18.1
  Bottom Layer w0.508: P1.1 33.53,33.135 45.352,33.135 46.61,31.877 U2.12
NetC2_2: C2.2 R1.2 U4.3 | length 9.9
  Top Layer w0.508: C2.2 90.285,106.819 R1.2 90.297,106.553 97.118,106.553 U4.3
NetC3_2: C3.2 R2.2 U4.5 | length 9.1
  Top Layer w0.508: C3.2 R2.2 U4.5
NetC4_2: C4.2 R3.2 U4.7 | length 10
  Top Layer w0.508: C4.2 R3.2 92.329,99.06 94.488,101.219 U4.7
NetC5_2: C5.2 R4.2 U5.3 | length 9.8
  Top Layer w0.508: C5.2 90.158,92.722 R4.2 94.234,92.71 95.885,91.059 U5.3
NetC6_2: C6.2 R5.2 U5.5 | length 9.6
  Top Layer w0.508: R5.2 C6.2 92.329,87.757 93.091,88.519 U5.5
NetC7_2: C7.2 R6.2 U5.7 | length 9.7
  Top Layer w0.508: C7.2 90.273,84.951 R6.2 91.301,85.979 U5.7
NetC8_2: C8.2 R7.2 U6.3 | length 10
  Top Layer w0.508: C8.2 R7.2 93.599,77.597 95.377,75.819 U6.3
NetC9_2: C9.2 R8.2 U6.5 | length 9.6
  Top Layer w0.508: R8.2 C9.2 94.742,72.517 95.504,73.279 U6.5
NetC10_2: C10.2 R9.2 U6.7 | length 9.6
  Top Layer w0.508: C10.2 R9.2 90.678,70.104 91.313,70.739 U6.7
NetC11_2: C11.2 R10.2 U7.3 | length 9.4
  Top Layer w0.508: C11.2 90.297,62.853 R10.2 U7.3
NetC12_2: C12.2 R11.2 U7.5 | length 9.1
  Top Layer w0.508: C12.2 90.297,58.027 R11.2 U7.5
NetC13_2: C13.2 R12.2 U7.7 | length 9.9
  Top Layer w0.508: C13.2 90.273,53.836 R12.2 91.936,55.499 U7.7
NetC14_2: C14.2 R13.2 U8.3 | length 9.5
  Top Layer w0.508: C14.2 90.309,48.121 R13.2 90.944,45.339 U8.3
NetC15_2: C15.2 R14.2 U8.5 | length 9.4
  Top Layer w0.508: C15.2 R14.2 91.047,42.799 U8.5
NetC16_2: C16.2 R15.2 U8.7 | length 9.8
  Top Layer w0.508: C16.2 90.273,39.231 R15.2 91.301,40.259 U8.7
NetC17_2: C17.2 R16.2 U9.3 | length 9.4
  Top Layer w0.508: C17.2 90.285,32.881 R16.2 95.163,30.988 95.64,30.511 96.96,30.511 U9.3
NetC18_2: C18.2 R17.2 U9.5 | length 9.8
  Top Layer w0.508: C18.2 90.297,25.92 R17.2 91.059,27.559 U9.5
NetC20_2: C20.2 R19.2 U10.3 | length 9.4
  Bottom Layer w0.508: C20.2 R19.2 91.047,94.615 U10.3
NetC21_2: C21.2 R20.2 U10.5 | length 9.7
  Bottom Layer w0.508: R20.2 C21.2 93.726,95.758 95.123,97.155 U10.5
NetC22_2: C22.2 R21.2 U10.7 | length 9.3
  Bottom Layer w0.508: C22.2 R21.2 90.781,99.695 U10.7
NetC23_2: C23.2 R22.2 U11.3 | length 9.7
  Bottom Layer w0.508: C23.2 90.273,76.085 R22.2 91.821,78.105 93.091,79.375 U11.3
NetC24_2: C24.2 R23.2 U11.5 | length 9
  Bottom Layer w0.508: C24.2 R23.2 97.245,82.042 U11.5
NetC25_2: C25.2 R24.2 U11.7 | length 9.2
  Bottom Layer w0.508: C25.2 90.285,86.348 R24.2 97.245,84.328 U11.7
NetC26_2: C26.2 R25.2 U12.3 | length 9.3
  Bottom Layer w0.508: C26.2 R25.2 93.98,62.992 95.123,64.135 U12.3
NetC27_2: C27.2 R26.2 U12.5 | length 8.9
  Bottom Layer w0.508: C27.2 R26.2 U12.5
NetC28_2: C28.2 R27.2 U12.7 | length 9.3
  Bottom Layer w0.508: C28.2 90.297,70.854 R27.2 90.678,69.215 U12.7
NetC29_2: C29.2 R28.2 U13.3 | length 9.1
  Bottom Layer w0.508: C29.2 R28.2 90.539,48.895 U13.3
NetC30_2: C30.2 R29.2 U13.5 | length 9.2
  Bottom Layer w0.508: R29.2 90.273,52.439 C30.2 91.035,51.435 U13.5
NetC31_2: C31.2 R30.2 U13.7 | length 9.1
  Bottom Layer w0.508: C31.2 R30.2 90.666,53.975 U13.7
NetC32_2: C32.2 R31.2 U14.3 | length 9.4
  Bottom Layer w0.508: C32.2 R31.2 93.853,32.893 94.615,33.655 U14.3
NetC33_2: C33.2 R32.2 U14.5 | length 9.6
  Bottom Layer w0.508: C33.2 90.297,34.81 R32.2 91.059,36.195 U14.5
NetC34_2: C34.2 R33.2 U14.7 | length 9.2
  Bottom Layer w0.508: C34.2 90.285,39.382 R33.2 90.932,38.735 U14.7
NGND: P1.2 P1.4 P1.6 P1.10 P1.12 P1.14 P1.16 P1.18 P1.20 P1.22 P1.24 P1.28 P1.32 P1.34 P1.36 P1.38 P1.40 P1.42 P1.44 P1.46 P1.48 P1.50 P1.54 P1.56 P1.58 P1.62 P1.66 P1.68 P3.1 P3.3 P4.3 R34.2 R35.2 R36.2 R37.2 U1.10 U1.11 U2.10 U2.11 U3.10 U3.11 U4.1 U4.4 U4.6 U5.1 U5.4 U5.6 U6.1 U6.4 U6.6 U7.1 U7.4 U7.6 U8.1 U8.4 U8.6 U9.1 U9.4 U9.6 U10.1 U10.4 U10.6 U11.1 U11.4 U11.6 U12.1 U12.4 U12.6 U13.1 U13.4 U13.6 U14.1 U14.4 U14.6
  other v1: 56.388,30.48 66.294,30.48 75.565,30.48 42.418,36.195 37.973,38.354 56.515,52.07 61.976,52.07 67.691,52.07 79.883,56.642 67.945,60.706 75.057,60.833 60.96,60.96 57.404,70.231 64.389,70.231 36.957,77.724 56.769,84.074 60.833,84.328 70.104,88.011 77.724,95.25
NPFI0: P1.52 R37.1 R41.1 U3.6 | length 106.1
  Top Layer w0.254: v1(32.893,86.487) 49.53,86.487 U3.6 ; R41.1 51.261,107.776 v1(51.308,107.823)
  Bottom Layer w0.254: P1.52 22.977,60.574 21.896,61.655 21.896,72.711 22.907,73.722 23.425,73.722 24.058,74.355 24.058,75.311 23.485,75.884 23.485,76.205 24.058,76.778 24.058,77.908 23.801,78.165 23.801,79.061 25.704,80.964 26.989,80.964 32.385,86.36 v1@33.147,86.36 ; v1(51.308,107.823) 53.848,110.363 66.802,110.363 U3.6
NPFI1: P1.26 R36.1 R40.1 U3.5 | length 82.3
  Top Layer w0.254: v1(35.687,88.392) R36.1 48.895,88.392 U3.5
  Bottom Layer w0.254: P1.26 26.787,70.734 25.706,71.815 25.706,72.828 25.963,73.085 25.963,74.098 25.706,74.355 25.706,75.251 25.963,75.508 25.963,76.638 25.706,76.895 25.706,77.791 26.339,78.424 26.974,78.424 33.005,84.455 ; 33.02,84.455 33.005,84.455 ; v1(35.687,88.392) 35.687,87.137 33.005,84.455 ; R40.1@51.435,105.283 55.372,109.22 65.405,109.22 U3.5
NPFI2: P1.64 R34.1 R38.1 U3.3 | length 71.3
  Top Layer w0.254: R38.1 59.182,110.363 U3.3
  Bottom Layer w0.254: P1.64 22.977,75.814 21.896,76.895 21.896,81.967 24.384,84.455 28.829,84.455 43.688,99.314 54.737,99.314 U3.3
NPFI3: P1.30 R35.1 R39.1 U3.4 | length 69.7
  Top Layer w0.254: R39.1 59.055,113.03 U3.4
  Bottom Layer w0.254: P1.30 27.611,75.627 27.611,76.521 28.244,77.154 28.762,77.154 34.163,82.555 34.163,84.582 43.434,93.853 51.816,93.853 U3.4
NPFI4: P1.33 P3.4 | length 29.2
  Top Layer w0.508: P1.33 28.692,84.191 33.02,88.519 P3.4
NPFI5: P1.67 P3.2 | length 40.7
  Top Layer w0.508: P1.67 24.882,83.937 22.093,86.726 22.093,90.677 24.638,93.222 24.638,101.807 25.828,102.997 25.828,104.441 29.591,108.204 33.401,108.204 P3.2
PFI0: P4.1 R41.2 | length 3.1
  Top Layer w0.254: P4.1 R41.2
PFI1: P4.2 R40.2 | length 3.1
  Bottom Layer w0.254: P4.2 45.593,105.41 R40.2
PFI2: P4.4 R38.2 | length 3
  Top Layer w0.254: P4.4 R38.2
PFI3: P4.5 R39.2 | length 3
  Top Layer w0.254: P4.5 48.307,112.903 R39.2
pads on no net: P1.8 P1.60 P1.M P2.A3 P2.A4 P2.A8 P2.C3 P2.C4 P2.C8 P3. U1.1 U1.20 U2.1 U2.20 U3.1 U3.2 U3.7 U3.8 U3.9 U3.12 U3.13 U3.14 U3.15 U3.16 U3.17 U3.18 U3.19 U3.20 U4.2 U4.8 U4.11 U5.2 U5.8 U5.11 U6.2 U6.8 U6.11 U7.2 U7.8 U7.11 U8.2 U8.8 U8.11 U9.2 U9.7 U9.8 U9.10 U9.11 U10.2 U10.8 U10.11 U11.2 U11.8 U11.11 U12.2 U12.8 U12.11 U13.2 U13.8 U13.11 U14.2 U14.8 U14.11

## Polygon pours and split planes (outlines as drawn)
NGND on Top Layer "Top Layer-NGND" (solid, remove dead copper, pour order 0): 22,22 22,118 99.06,118 99.06,22
GND on Top Layer "Top Layer-GND" (solid, pour order 6): 100,22 178,22 178,118 100,118
GND on Bottom Layer "Bottom Layer - GND" (solid, remove dead copper, pour order 4): 100,22 178,22 178,118 100,118
NGND on Bottom Layer "Bottom Layer - NGND" (solid, remove dead copper, pour order 2): 22,22 99.06,22 99.06,118 22,118

## Silkscreen, mask and mechanical layers (free items; w line width, h text height)
Top Overlay:
  lines w0.254: 22,22 22,118 99.06,118 99.06,22 22,22 ; 100,22 100,118 178,118 178,22 100,22
Mechanical 1:
  the board outline again, w0.254

## Text inside footprints (layer, text, board x,y; h text height)
C1: Top Overlay "+" at 103.505,115.062 h1.5 r180
P1: Bottom Overlay "68" at 20.701,81.026 h1.5 r270; Bottom Overlay "36" at 20.701,34.544 h1.5 r270; Bottom Overlay "33" at 27.94,80.899 h1.5 r270; Bottom Overlay "1" at 28.067,35.179 h1.5 r270
P2: Top Overlay "1" at 169.42,109.62 h1.5 r270; Top Overlay "a" at 176.7,111.58 h1.5 r270; Top Overlay "c" at 171.62,111.58 h1.5 r270; Top Overlay "32" at 169.42,31.88 h1.5 r270; Top Overlay "11" at 169.42,84.845 h1.5 r270; Top Overlay "21" at 169.42,59.82 h1.5 r270; Mechanical 1 "PCB Edge" at 183,116.47 h0.6 r270